# EAGLE board LNA_v3 (EAGLE 7.7.0)
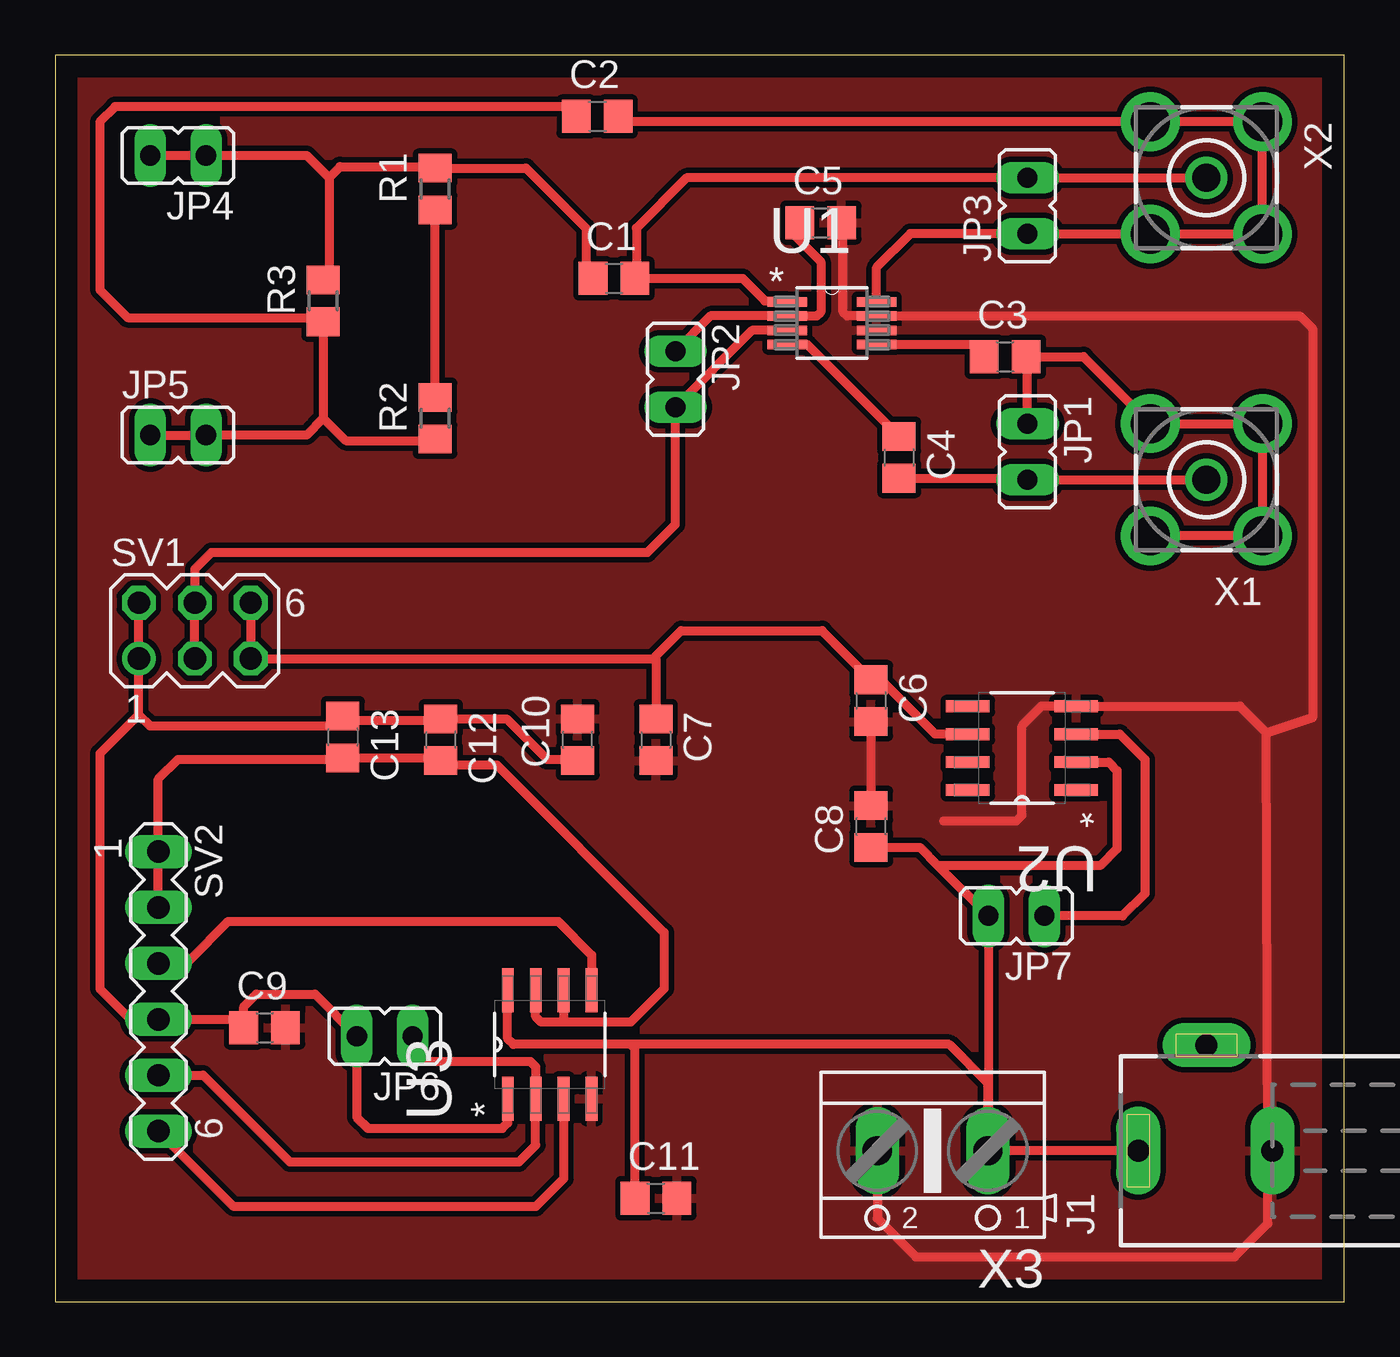
[diagram p0: board, top side]

Size 58.6 x 56.63 mm. Coordinates in mm from the lower left corner, seen from the top.
Outline: 0,0 58.6,0 58.6,56.63 0,56.63 0,0
Copper layers (1*16): Top 0.035mm / dielectric 1.5mm / Bottom 0.035mm
Design rules "default *": minimum track width 10mil, minimum drill 24mil, track to track 10mil, track to pad 10mil, pad to pad 10mil, via to via 10mil, smd to smd 10mil, copper to edge 40mil, drill to drill 8mil, minimum pad ring 10mil, minimum via ring 8mil, stop-mask expansion 4mil, vias tented up to drill 0mil, thermal gap 10mil

## Footprints (pad centres in the part's own frame; a part is rotated, then mirrored left to right if it is on the bottom)
C0805 = smd 1.3 x 1.5: 1 -0.95,0; 2 0.95,0
DCJ0202 = drill 1 pad 2 long: 1 0,3.1; 2 4.8,0; 3 0,-3
JP1 = drill 0.914 long: 1 0,-1.27; 2 0,1.27
R0805 = smd 1.3 x 1.5: 1 -0.95,0; 2 0.95,0
MA03-2 = drill 1.016: 1 -2.54,-1.27 | drill 1.016 octagon: 2 -2.54,1.27; 3 0,-1.27; 4 0,1.27; 5 2.54,-1.27; 6 2.54,1.27
MA06-1 = drill 1.016 long: 1 -6.35,0; 2 -3.81,0; 3 -1.27,0; 4 1.27,0; 5 3.81,0; 6 6.35,0
SOP65P490X110-8N = smd 1.778 x 0.432: 1 -2.032,0.965; 2 -2.032,0.33; 3 -2.032,-0.33; 4 -2.032,-0.965; 5 2.032,-0.965; 6 2.032,-0.33; 7 2.032,0.33; 8 2.032,0.965
SOIC127P600X175-8N = smd 1.981 x 0.533: 1 -2.464,1.905; 2 -2.464,0.635; 3 -2.464,-0.635; 4 -2.464,-1.905; 5 2.464,-1.905; 6 2.464,-0.635; 7 2.464,0.635; 8 2.464,1.905
BU-SMA-V = drill 1.27: 1 0,0 | drill 1.778: 2 -2.55,2.55; 3 2.55,2.55; 4 2.55,-2.55; 5 -2.55,-2.55
AK500/2 = drill 1.321 long: 1 -2.515,0; 2 2.515,0

## Placement (x,y rotation side)
C1  0.001uF  [C0805]  25.4,46.48 0 top
C2  0.001uF  [C0805]  24.64,53.85 0 top
C3  0.001uF  [C0805]  43.18,42.93 0 top
C4  0.001uF  [C0805]  38.35,38.35 270 top
C5  0.001uF  [C0805]  34.8,49.02 0 top
C6  1uF  [C0805]  37.08,27.3 270 top
C7  1uF  [C0805]  27.3,25.53 270 top
C8  1uF  [C0805]  37.08,21.59 90 top
C9  1uF  [C0805]  9.53,12.45 0 top
C10  1uF  [C0805]  23.75,25.53 90 top
C11  0.1uF  [C0805]  27.3,4.7 0 top
C12  100pF  [C0805]  17.53,25.53 270 top
C13  100pF  [C0805]  13.08,25.65 270 top
J1  DCJ0202  [DCJ0202]  52.32,6.86 90 top
JP1  [JP1]  44.2,38.61 180 top
JP2  [JP1]  28.19,41.91 180 top
JP3  [JP1]  44.2,49.78 0 top
JP4  [JP1]  5.59,52.07 90 top
JP5  [JP1]  5.59,39.37 270 top
JP6  [JP1]  14.99,12.06 90 top
JP7  [JP1]  43.69,17.53 90 top
R1  100  [R0805]  17.27,50.55 90 top
R2  100  [R0805]  17.27,40.13 90 top
R3  100  [R0805]  12.19,45.47 90 top
SV1  [MA03-2]  6.35,30.48 0 top
SV2  [MA06-1]  4.7,14.1 270 top
U1  [SOP65P490X110-8N]  35.31,44.45 0 top
U2  LT1461DHS8-5PBF  [SOIC127P600X175-8N]  43.94,25.15 180 top
U3  LP4951CM  [SOIC127P600X175-8N]  22.48,11.68 90 top
X1  BU-SMA-V  [BU-SMA-V]  52.32,37.34 180 top
X2  BU-SMA-V  [BU-SMA-V]  52.32,51.05 270 top
X3  [AK500/2]  39.88,6.86 180 top

## Library data of the parts
C1-C13 R1-R3 = rcl
J1 = con-jack; OC_FARNELL: unknown; OC_NEWARK: unknown
JP1-JP7 = jumper
SV1 SV2 = con-lstb; OC_FARNELL: unknown; OC_NEWARK: unknown
U1 = AD8350ARMZ20; MPN: AD8350ARMZ20; OC_FARNELL: 1438867; OC_NEWARK: 59K6657; PACKAGE: 8-Lead microSOIC; SUPPLIER: Analog Devices
U2 = LTC_By_element14_Batch_1; MPN: LT1461DHS8-5#PBF; OC_FARNELL: 1663431; OC_NEWARK: 57M4326; PACKAGE: SOIC-8; SUPPLIER: Linear Technology
U3 = LP4951C; MPN: LP4951CM; PACKAGE: SOIC-8; SUPPLIER: Texas Instruments
X1 X2 = con-coax; OC_FARNELL: unknown; OC_NEWARK: unknown
X3 = con-ptr500; OC_FARNELL: unknown; OC_NEWARK: unknown

## Nets
+5V: JP2.2 SV1.3 SV1.4 U1.3
+12V: C8.1 C11.1 J1.1 JP7.2 U2.2 U3.8 X3.1
AGND: C5.2 C6.2 C7.2 C8.2 C9.2 C10.2 C11.2 J1.3 U1.6 U1.7 U2.4 U3.4 X3.2
ERROR: SV2.3 U3.5
FEEDBACK: C12.2 C13.2 SV2.1 SV2.2 U3.6 U3.7
IN+: C1.2 JP3.2 U1.1 X2.1
IN-: C2.2 JP3.1 U1.8 X2.2 X2.3 X2.4 X2.5
LP4951_OUT: C9.1 C10.1 C12.1 C13.1 JP6.2 SV1.1 SV1.2 SV2.4 U3.1
LT1461_VOUT: C6.1 C7.1 SV1.5 SV1.6 U2.6
N$1: C1.1 JP4.1 JP4.2 R1.2 R3.2
N$2: R1.1 R2.2
N$3: C5.1 JP2.1 U1.2
N$4: C2.1 JP5.1 JP5.2 R2.1 R3.1
N$5: C3.1 U1.5
N$6: C4.1 U1.4
N$7: JP7.1 U2.3
OUT+: C4.2 JP1.2 X1.1
OUT-: C3.2 JP1.1 X1.2 X1.3 X1.4 X1.5
SENSE: JP6.1 SV2.5 U3.2
SHUTDOWN: SV2.6 U3.3

## Tracks (layer width: path | path; a pad name or v marks a point on that pad's centre or on a via)
+5V
  Top 0.406: U1.3 31.67,44.12 JP2.2 28.19,35.31 26.92,34.04 7.11,34.04 6.35,33.27 SV1.4 | SV1.4 6.35,32 | SV1.3 SV1.4
+12V
  Top 0.406: C8.1 39.3,20.64 40.13,19.81 | 40.13,19.81 JP7.2 42.42,6.88 | 42.42,6.88 X3.1 42.39,9.93 40.64,11.68 26.16,11.68 | 42.42,6.88 49.2,6.88 J1.1 | U2.2 47.88,24.51 48.26,24.13 48.26,20.57 47.5,19.81 40.13,19.81 | 26.16,11.68 20.83,11.68 20.57,11.94 U3.8 | C11.1 26.36,11.49 26.16,11.68
AGND
  Top 0.406: X3.2 37.36,3.79 39.12,2.03 53.59,2.03 55.12,3.56 55.12,6.65 55.05,25.84 | 40.39,21.84 43.69,21.84 43.94,22.1 43.94,26.16 44.83,27.05 U2.4 53.85,27.05 55.05,25.84 | 37.34,22.79 C8.2 C6.2 | C5.2 35.81,48.96 35.81,44.96 35.99,44.78 U1.7 56.57,44.78 57.15,44.2 57.15,26.54 55.05,25.84
  pour Top: 0,56.64 58.67,56.64 58.67,0 0,0.13
ERROR
  Top 0.406: U3.5 24.38,15.75 22.86,17.27 7.87,17.27 6.1,15.49 4.83,15.49 SV2.3
FEEDBACK
  Top 0.406: 18.03,24.38 17.71,24.7 C13.2 13.02,24.64 5.59,24.64 4.7,23.75 SV2.1 SV2.2 | 18.03,24.38 17.72,24.38 C12.2 17.59,24.64 | 18.03,24.38 20.07,24.38 27.69,16.76 27.69,14.22 26.16,12.7 23.11,12.7 | 23.11,12.7 22.1,12.7 21.84,12.95 U3.7 | U3.6 23.11,12.7
IN+
  Top 0.406: U1.1 33.22,45.47 32.26,45.47 31.24,46.48 C1.2 26.42,46.55 26.42,48.77 28.7,51.05 JP3.2 X2.1
IN-
  Top 0.406: U1.8 37.34,46.99 38.86,48.51 JP3.1 50.28,48.51 50.29,48.5 | 49.76,48.51 X2.4 50.29,48.5 | 50.29,48.5 X2.3 X2.2 X2.5 25.83,53.6 C2.2
LP4951_OUT
  Top 0.406: U3.1 20.57,8.13 20.32,7.87 14.22,7.87 13.72,8.38 JP6.2 11.81,13.97 9.14,13.97 8.57,13.4 C9.1 8.19,12.83 SV2.4 4.57,12.95 3.3,12.95 2.03,14.22 2.03,24.89 3.81,26.67 | 13.46,26.67 13.72,26.42 | 13.72,26.42 13.27,26.42 C13.1 12.64,26.16 4.32,26.16 3.81,26.67 | 13.72,26.42 17.46,26.42 C12.1 20.51,26.48 22.35,24.64 23.69,24.64 C10.1 | 3.81,26.67 SV1.1 SV1.2
LT1461_VOUT
  Top 0.406: U2.6 40.01,25.78 37.53,28.25 C6.1 34.86,30.48 28.45,30.48 27.3,29.34 27.3,29.21 | SV1.6 SV1.5 27.3,29.21 | 27.3,29.21 C7.1
N$1
  Top 0.406: JP4.2 JP4.1 11.43,52.07 12.45,51.05 | C1.1 24.13,46.8 24.13,48.77 21.4,51.5 R1.2 17.21,51.56 12.95,51.56 12.45,51.05 | 12.45,51.05 12.45,46.67 R3.2
N$2
  Top 0.406: R2.2 R1.1
N$3
  Top 0.406: JP2.1 29.79,44.78 U1.2 34.62,44.78 34.8,44.96 34.8,47.24 33.53,48.51 33.53,48.7 C5.1
N$4
  Top 0.406: JP5.1 JP5.2 11.43,39.37 12.19,40.13 | 12.19,40.13 R3.1 12,44.7 3.3,44.7 2.03,45.97 2.03,53.59 2.73,54.29 23.69,54.29 C2.1 | 12.19,40.13 13.21,39.12 17.21,39.12 R2.1
N$5
  Top 0.406: U1.5 41.67,43.48 C3.1
N$6
  Top 0.406: U1.4 34.17,43.48 C4.1
N$7
  Top 0.406: U2.3 48.39,25.78 49.53,24.64 49.53,18.54 48.51,17.53 JP7.1
OUT+
  Top 0.406: C4.2 44.13,37.4 JP1.2 X1.1
OUT-
  Top 0.406: X1.3 X1.2 X1.5 X1.4 46.74,42.93 C3.2 44.2,42.86 JP1.1
SENSE
  Top 0.406: JP6.1 16.26,11.56 16.89,10.92 21.59,10.92 21.84,10.67 U3.2 21.84,7.11 21.08,6.35 10.67,6.35 6.73,10.29 SV2.5
SHUTDOWN
  Top 0.406: U3.3 23.11,5.59 21.84,4.32 8.13,4.32 SV2.6